# EAGLE board T14_SuperDuper_V_003 (EAGLE 7.1.0)
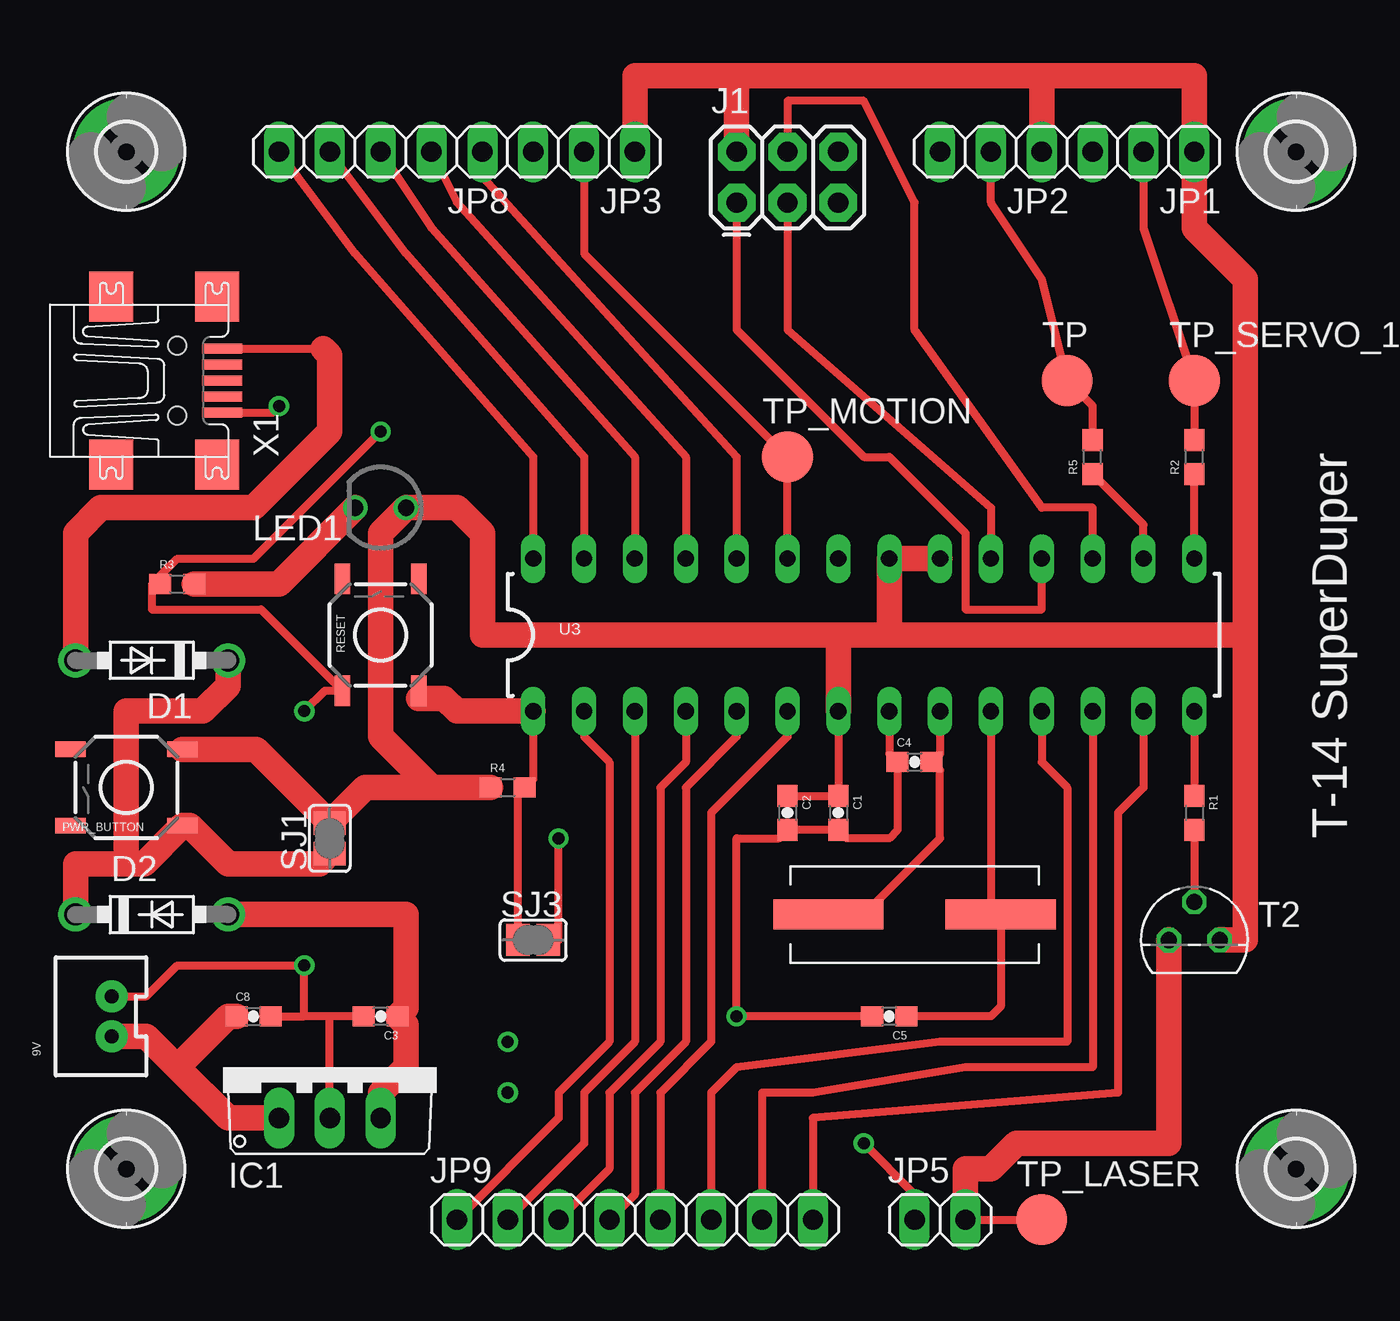
[diagram p0: board, top side]
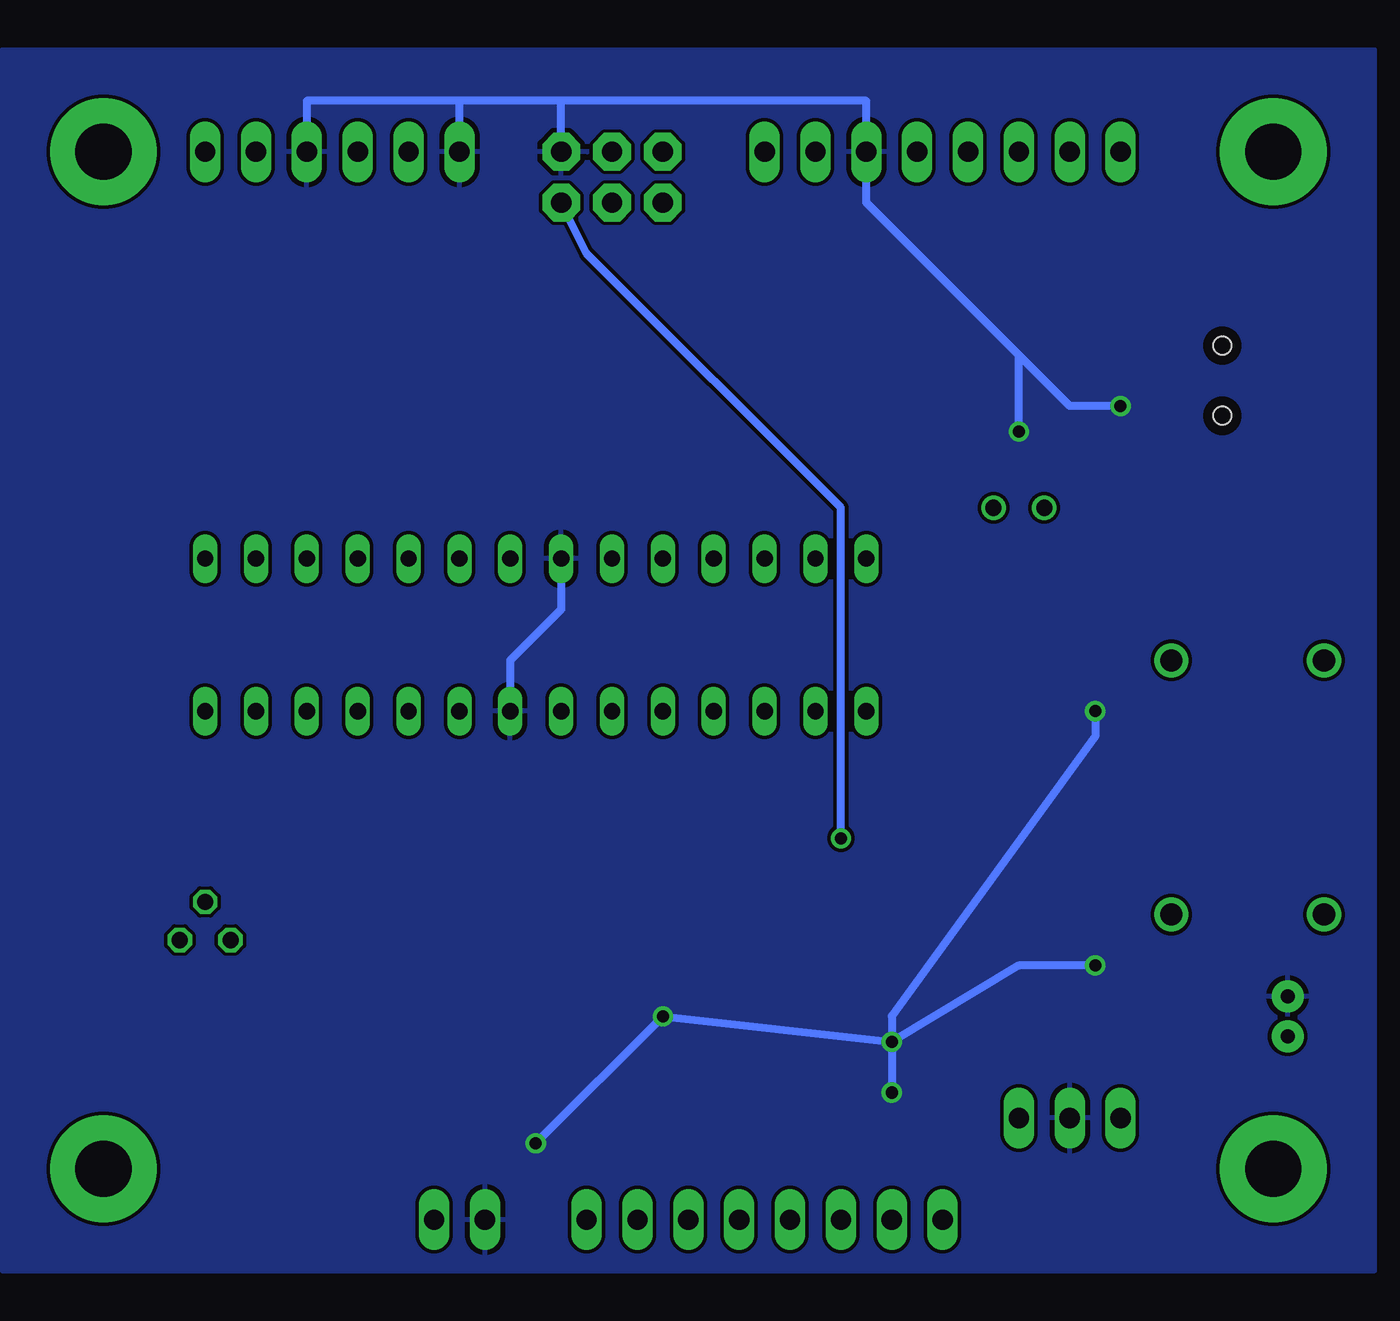
[diagram p1: board, bottom side, seen from below]

No outline drawn. Coordinates in mm, seen from the top.
Copper layers (1*16): Top 0.0178mm / dielectric 59mil / Bottom 0.0178mm
Design rules "sunstone-valueproto": minimum track width 7mil, minimum drill 16mil, track to track 7mil, track to pad 7mil, pad to pad 7mil, via to via 7mil, smd to smd 7mil, copper to edge 20mil, drill to drill 16mil, minimum pad ring 8mil, minimum via ring 8mil, stop-mask expansion 3mil, vias tented up to drill 0mil, thermal gap 10mil

## Footprints (pad centres in the part's own frame; a part is rotated, then mirrored left to right if it is on the bottom)
JST-2-PTH-VERT = drill 0.7 pad 1.6: 1 -1,-0.55; 2 1,-0.55
0603-CAP = smd 1.1 x 1: 1 -0.85,0; 2 0.85,0
DO41-7.6 = drill 1.1 pad 1.7: A 3.81,0; C -3.81,0
2,8-PAD = drill 2.8 pad 5.334: B2,8 0,0
TO220V = drill 1.016 long: 1 -2.54,-2.54; 2 0,-2.54; 3 2.54,-2.54
2X3 = drill 1.016 pad 1.88 octagon: 1 0,0; 2 0,2.54; 3 2.54,0; 4 2.54,2.54; 5 5.08,0; 6 5.08,2.54
1X03 = drill 1.016 long: 1 -2.54,0; 2 0,0; 3 2.54,0
1X02 = drill 1.016 long: 1 -1.27,0; 2 1.27,0
1X05 = drill 1.016 long: 1 -5.08,0; 2 -2.54,0; 3 0,0; 4 2.54,0; 5 5.08,0
1X08 = drill 1.016 long: 1 -8.89,0; 2 -6.35,0; 3 -3.81,0; 4 -1.27,0; 5 1.27,0; 6 3.81,0; 7 6.35,0; 8 8.89,0
LED3MM-NS = drill 0.813: A -1.27,0; K 1.27,0
TACTILE-SWITCH-SMD = smd 1.524 x 0.762: 1 -2.794,1.905; 2 2.794,1.905; 3 -2.794,-1.905; 4 2.794,-1.905
0603 = smd 1.1 x 1: 1 -0.85,0; 2 0.85,0
SJ = smd 1.168 x 1.6: 1 -0.762,0; 2 0.762,0
TO92 = drill 0.813 octagon: 1 1.27,0; 2 0,1.905; 3 -1.27,0
B2,54 = smd 2.54 x 2.54: TP 0,0
DIL28-3 = drill 0.813 long: 1 -16.51,-3.81; 2 -13.97,-3.81; 3 -11.43,-3.81; 4 -8.89,-3.81; 5 -6.35,-3.81; 6 -3.81,-3.81; 7 -1.27,-3.81; 8 1.27,-3.81; 9 3.81,-3.81; 10 6.35,-3.81; 11 8.89,-3.81; 12 11.43,-3.81; 13 13.97,-3.81; 14 16.51,-3.81; 15 16.51,3.81; 16 13.97,3.81; 17 11.43,3.81; 18 8.89,3.81; 19 6.35,3.81; 20 3.81,3.81; 21 1.27,3.81; 22 -1.27,3.81; 23 -3.81,3.81; 24 -6.35,3.81; 25 -8.89,3.81; 26 -11.43,3.81; 27 -13.97,3.81; 28 -16.51,3.81
UX60-MB-5ST = smd 2 x 0.5: 1 2.25,1.6; 2 2.25,0.8; 3 2.25,0; 4 2.25,-0.8; 5 2.25,-1.6 | smd 2.2 x 2.5: M1 -3.3,-4.2; M2 -3.3,4.2; M3 2,4.2; M4 2,-4.2 | hole 0.9: 0,-1.75; 0,1.75
CRYSTAL-SMD-10.5X4.8-2PIN = smd 5.5 x 1.5: P$1 -4.3,0; P$2 4.3,0

## Placement (x,y rotation side)
9V  M02JST-PTH-VERT  [JST-2-PTH-VERT]  3.81,12.7 90 top
C1  4.7uF  [0603-CAP]  40.64,22.86 270 top
C2  0.1uF  [0603-CAP]  38.1,22.86 270 top
C3  1uF  [0603-CAP]  17.78,12.7 180 top
C4  22pF  [0603-CAP]  44.45,25.4 0 top
C5  22pF  [0603-CAP]  43.18,12.7 180 top
C8  10uF  [0603-CAP]  11.43,12.7 0 top
D1  1N5817-B  [DO41-7.6]  6.35,30.48 180 top
D2  1N5817-B  [DO41-7.6]  6.35,17.78 0 top
H5  MOUNT-PAD-ROUND2.8  [2,8-PAD]  5.08,55.88 0 top
H6  MOUNT-PAD-ROUND2.8  [2,8-PAD]  5.08,5.08 0 top
H7  MOUNT-PAD-ROUND2.8  [2,8-PAD]  63.5,5.08 0 top
H8  MOUNT-PAD-ROUND2.8  [2,8-PAD]  63.5,55.88 0 top
IC1  7805TV  [TO220V]  15.24,10.16 0 top
J1  AVR_SPI_PRG_6PTH  [2X3]  35.56,53.34 0 top
JP1  [1X03]  55.88,55.88 180 top
JP2  [1X03]  48.26,55.88 180 top
JP3  [1X03]  27.94,55.88 180 top
JP5  [1X02]  45.72,2.54 0 top
JP8  [1X05]  17.78,55.88 180 top
JP9  [1X08]  30.48,2.54 0 top
LED1  [LED3MM-NS]  17.78,38.1 180 top
PWR_BUTTON  SWITCH-MOMENTARY-2SMD  [TACTILE-SWITCH-SMD]  5.08,24.13 180 top
R1  1k  [0603]  58.42,22.86 270 top
R2  33OHM  [0603]  58.42,40.64 90 top
R3  150  [0603]  7.62,34.29 0 top
R4  10k  [0603]  24.13,24.13 0 top
R5  33OHM  [0603]  53.34,40.64 90 top
RESET  TAC_SWITCHSMD  [TACTILE-SWITCH-SMD]  17.78,31.75 90 top
SJ1  [SJ]  15.24,21.59 90 top
SJ3  [SJ]  25.4,16.51 0 top
T2  2N3904  [TO92]  58.42,16.51 0 top
TP  PTR1B2,54  [B2,54]  52.07,44.45 0 top
TP_LASER  PTR1B2,54  [B2,54]  50.8,2.54 0 top
TP_MOTION  PTR1B2,54  [B2,54]  38.1,40.64 0 top
TP_SERVO_1  PTR1B2,54  [B2,54]  58.42,44.45 0 top
U3  ATMEGA328P_PDIP  [DIL28-3]  41.91,31.75 0 top
X1  MINI-USB-UX60-MB-5ST  [UX60-MB-5ST]  7.62,44.45 0 top
Y1  16MHz  [CRYSTAL-SMD-10.5X4.8-2PIN]  44.45,17.78 180 top

## Library data of the parts
9V J1 = SparkFun-Connectors
C1 = SparkFun-Capacitors; PROD_ID: CAP-08280
C2 = SparkFun-Capacitors; PROD_ID: CAP-00810
C3 C8 = SparkFun-Capacitors; PROD_ID: CAP-00810; VALUE: 0.1uF
C4 C5 = SparkFun-Capacitors; PROD_ID: CAP-08280; VALUE: 4.7uF
D1 D2 = diode
H5-H8 = holes
IC1 = linear
JP1-JP3 JP5 JP8 JP9 = pinhead
LED1 = SparkFun-LED
PWR_BUTTON RESET = SparkFun-Electromechanical; PROD_ID: SWCH-08247
R1 R4 = SparkFun-Resistors; PROD_ID: RES-08270; VALUE: 33OHM
R2 R3 R5 = SparkFun-Resistors; PROD_ID: RES-08270
SJ1 SJ3 = jumper
T2 = transistor
TP TP_LASER TP_MOTION TP_SERVO_1 = testpad
U3 = SparkFun-DigitalIC
X1 = con-hirose; OC_FARNELL: unknown; OC_NEWARK: unknown
Y1 = SparkFun-FreqCtrl

## Nets
5V: C1.1 C2.1 J1.2 JP1.1 JP2.1 JP3.1 LED1.A PWR_BUTTON.3 R4.1 SJ1.2 T2.1 U3.7 U3.20 U3.21
GND: 9V.2 C1.2 C2.2 C3.2 C4.1 C5.2 C8.2 IC1.2 J1.6 JP1.3 JP2.3 JP3.3 JP5.1 R3.1 RESET.1 U3.8 U3.22 X1.5
N$1: D1.A X1.1
N$2: R2.1 U3.15
N$3: R1.2 T2.2
N$4: JP1.2 R2.2 TP_SERVO_1.TP
N$5: C5.1 U3.10 Y1.P$1
N$6: R5.1 U3.16
N$7: JP2.2 R5.2 TP.TP
N$8: 9V.1 C8.1 IC1.1
N$9: R1.1 U3.14
N$10: C3.1 D2.A IC1.3
N$11: J1.4 U3.17
N$12: J1.1 U3.18
N$13: J1.3 U3.19
N$14: R4.2 RESET.3 SJ3.1 U3.1
N$15: JP3.2 TP_MOTION.TP U3.23
N$16: C4.2 U3.9 Y1.P$2
N$17: JP8.5 U3.28
N$18: JP8.4 U3.27
N$19: JP8.3 U3.26
N$20: JP8.2 U3.25
N$21: JP8.1 U3.24
N$22: JP9.1 U3.2
N$23: JP9.2 U3.3
N$24: JP9.3 U3.4
N$25: JP9.4 U3.5
N$26: JP9.5 U3.6
N$27: JP9.6 U3.11
N$28: JP9.7 U3.12
N$29: JP9.8 U3.13
N$30: JP5.2 T2.3 TP_LASER.TP
N$31: D1.C D2.C PWR_BUTTON.1 SJ1.1
N$32: J1.5 SJ3.2
N$33: LED1.K R3.2

## Tracks (layer width: path | path; a pad name or v marks a point on that pad's centre or on a via)
5V
  Top 0.406: U3.7 C1.1 C2.1
  Top 1.27: U3.7 40.64,31.75 | 40.64,31.75 22.86,31.75 22.86,36.83 21.59,38.1 LED1.A 17.78,36.83 17.78,26.67 20.32,24.13 R4.1 17.02,24.13 SJ1.2 11.56,26.04 PWR_BUTTON.3 | 40.64,31.75 43.18,31.75 | 43.18,31.75 60.96,31.75 | T2.1 60.96,16.51 60.96,31.75 | 60.96,31.75 60.96,49.53 58.42,52.07 JP1.1 58.42,59.69 50.8,59.69 | JP2.1 50.8,59.69 | J1.2 35.56,59.69 | U3.20 U3.21 43.18,31.75 | 35.56,59.69 50.8,59.69 | JP3.1 30.48,59.69 35.56,59.69
GND  (via drill 0.6)
  Top 0.406: U3.8 43.18,25.82 C4.1 43.6,22.01 43.18,21.59 41.06,21.59 C1.2 C2.2 37.68,21.59 35.56,21.59 v35.56,12.7 C5.2 | v13.97,27.94 14.99,28.96 RESET.1 11.81,33.02 6.35,33.02 6.35,34.29 R3.1 6.77,34.71 7.62,35.56 11.43,35.56 v17.78,41.91 | JP5.1 44.45,3.81 v41.91,6.35 | X1.5 12.37,42.85 v12.7,43.18 | 9V.2 6.08,13.7 7.62,15.24 v13.97,15.24 13.97,12.7 | C8.2 13.97,12.7 | C3.2 15.24,12.7 | 15.24,12.7 13.97,12.7 | IC1.2 15.24,12.7
  Bottom 0.406: U3.22 40.64,33.02 43.18,30.48 U3.8 | J1.6 40.64,58.42 | 40.64,58.42 45.72,58.42 | JP2.3 45.72,58.42 | 45.72,58.42 53.34,58.42 JP1.3 | 40.64,58.42 25.4,58.42 JP3.3 25.4,53.34 17.78,45.72 | v24.13,11.43 v35.56,12.7 v41.91,6.35 | v13.97,27.94 13.97,26.67 24.13,12.7 v24.13,11.43 | v12.7,43.18 15.24,43.18 17.78,45.72 | v17.78,41.91 17.78,45.72 | v13.97,15.24 17.78,15.24 v24.13,11.43 | v24.13,11.43 v24.13,8.89
  pour Bottom: 0,0 0,60.96 68.58,60.96 68.58,0
N$1
  Top 0.406: X1.1 14.91,46.05
  Top 1.27: 14.91,46.05 15.24,45.72 15.24,41.91 11.43,38.1 3.81,38.1 2.54,36.83 D1.A
N$2
  Top 0.406: U3.15 R2.1
N$3
  Top 0.406: R1.2 T2.2
N$4
  Top 0.406: JP1.2 55.88,52.07 TP_SERVO_1.TP R2.2
N$5
  Top 0.406: U3.10 48.26,18.27 Y1.P$1 48.75,13.19 48.26,12.7 C5.1
N$6
  Top 0.406: U3.16 55.88,37.25 R5.1
N$7
  Top 0.406: R5.2 53.34,43.18 TP.TP 50.8,49.53 48.26,53.34 JP2.2
N$8
  Top 1.27: 9V.1 6.08,11.7 7.62,10.16 | 7.62,10.16 10.16,7.62 IC1.1 | C8.1 10.16,12.7 7.62,10.16
N$9
  Top 0.406: U3.14 R1.1
N$10
  Top 1.27: IC1.3 17.78,8.89 19.05,10.16 19.05,12.28 C3.1 19.05,13.12 19.05,17.78 D2.A
N$11
  Top 0.406: U3.17 53.34,38.1 50.8,38.1 44.45,46.99 44.45,53.34 41.91,58.42 38.1,58.42 J1.4
N$12
  Top 0.406: J1.1 35.56,46.99 41.91,40.64 43.18,40.64 46.99,36.83 46.99,33.02 50.8,33.02 U3.18
N$13
  Top 0.406: J1.3 38.1,46.99 48.26,38.1 U3.19
N$14
  Top 0.406: U3.1 25.4,24.55 R4.2 24.64,23.79 SJ3.1 | RESET.3 19.68,28.57
  Top 1.27: 19.68,28.57 20.95,28.57 21.59,27.94 U3.1
N$15
  Top 0.406: JP3.2 27.94,50.8 TP_MOTION.TP U3.23
N$16
  Top 0.406: Y1.P$2 41.91,17.78 45.72,21.59 45.72,24.98 C4.2 45.72,25.82 U3.9
N$17
  Top 0.406: JP8.5 16.51,50.8 25.4,40.64 U3.28
N$18
  Top 0.406: JP8.4 19.05,50.8 27.94,40.64 U3.27
N$19
  Top 0.406: JP8.3 20.32,52.07 30.48,40.64 U3.26
N$20
  Top 0.406: JP8.2 21.59,53.34 33.02,40.64 U3.25
N$21
  Top 0.406: JP8.1 22.86,54.61 35.56,40.64 U3.24
N$22
  Top 0.406: U3.2 27.94,26.67 29.21,25.4 29.21,11.43 26.67,8.89 26.67,7.62 JP9.1
N$23
  Top 0.406: U3.3 30.48,11.43 27.94,8.89 27.94,6.35 JP9.2
N$24
  Top 0.406: U3.4 33.02,25.4 31.75,24.13 31.75,11.43 29.21,8.89 29.21,5.08 JP9.3
N$25
  Top 0.406: U3.5 35.56,26.67 33.02,24.13 33.02,11.43 30.48,8.89 30.48,3.81 JP9.4
N$26
  Top 0.406: U3.6 38.1,26.67 34.29,22.86 34.29,11.43 31.75,8.89 JP9.5
N$27
  Top 0.406: U3.11 50.8,25.4 52.07,24.13 52.07,11.43 45.72,11.43 35.56,10.16 34.29,8.89 JP9.6
N$28
  Top 0.406: U3.12 53.34,10.16 46.99,10.16 39.37,8.89 36.83,8.89 JP9.7
N$29
  Top 0.406: U3.13 55.88,24.13 54.61,22.86 54.61,8.89 39.37,7.62 JP9.8
N$30
  Top 0.406: JP5.2 TP_LASER.TP
  Top 1.27: T2.3 57.15,6.35 49.53,6.35 48.26,5.08 46.99,5.08 JP5.2
N$31
  Top 1.27: D2.C 2.54,20.32 5.08,20.32 | 5.08,20.32 5.97,20.32 PWR_BUTTON.1 8.26,22.23 10.16,20.32 14.73,20.32 SJ1.1 | D1.C 10.16,29.21 8.89,27.94 5.08,27.94 5.08,20.32
N$32  (via drill 0.6)
  Top 0.406: SJ3.2 26.67,16.51 v26.67,21.59
  Bottom 0.406: v26.67,21.59 26.67,38.1 39.37,50.8 J1.5
N$33
  Top 1.27: R3.2 12.7,34.29 LED1.K

## Text on the board
tPlace: T-14 SuperDuper
tPlate: Motion | Servo-2 | Servo-1 | Laser